# Altium PCB ConnectorsBoard.PcbDoc
Units mil, origin at the board's own origin, x right, y up, seen from the top; angles counter-clockwise.
Board outline 12244.09 x 7755.91 mil, 2 copper layers (Top Layer, Bottom Layer); 25 components, 41 nets, 176 pads, 48 vias.
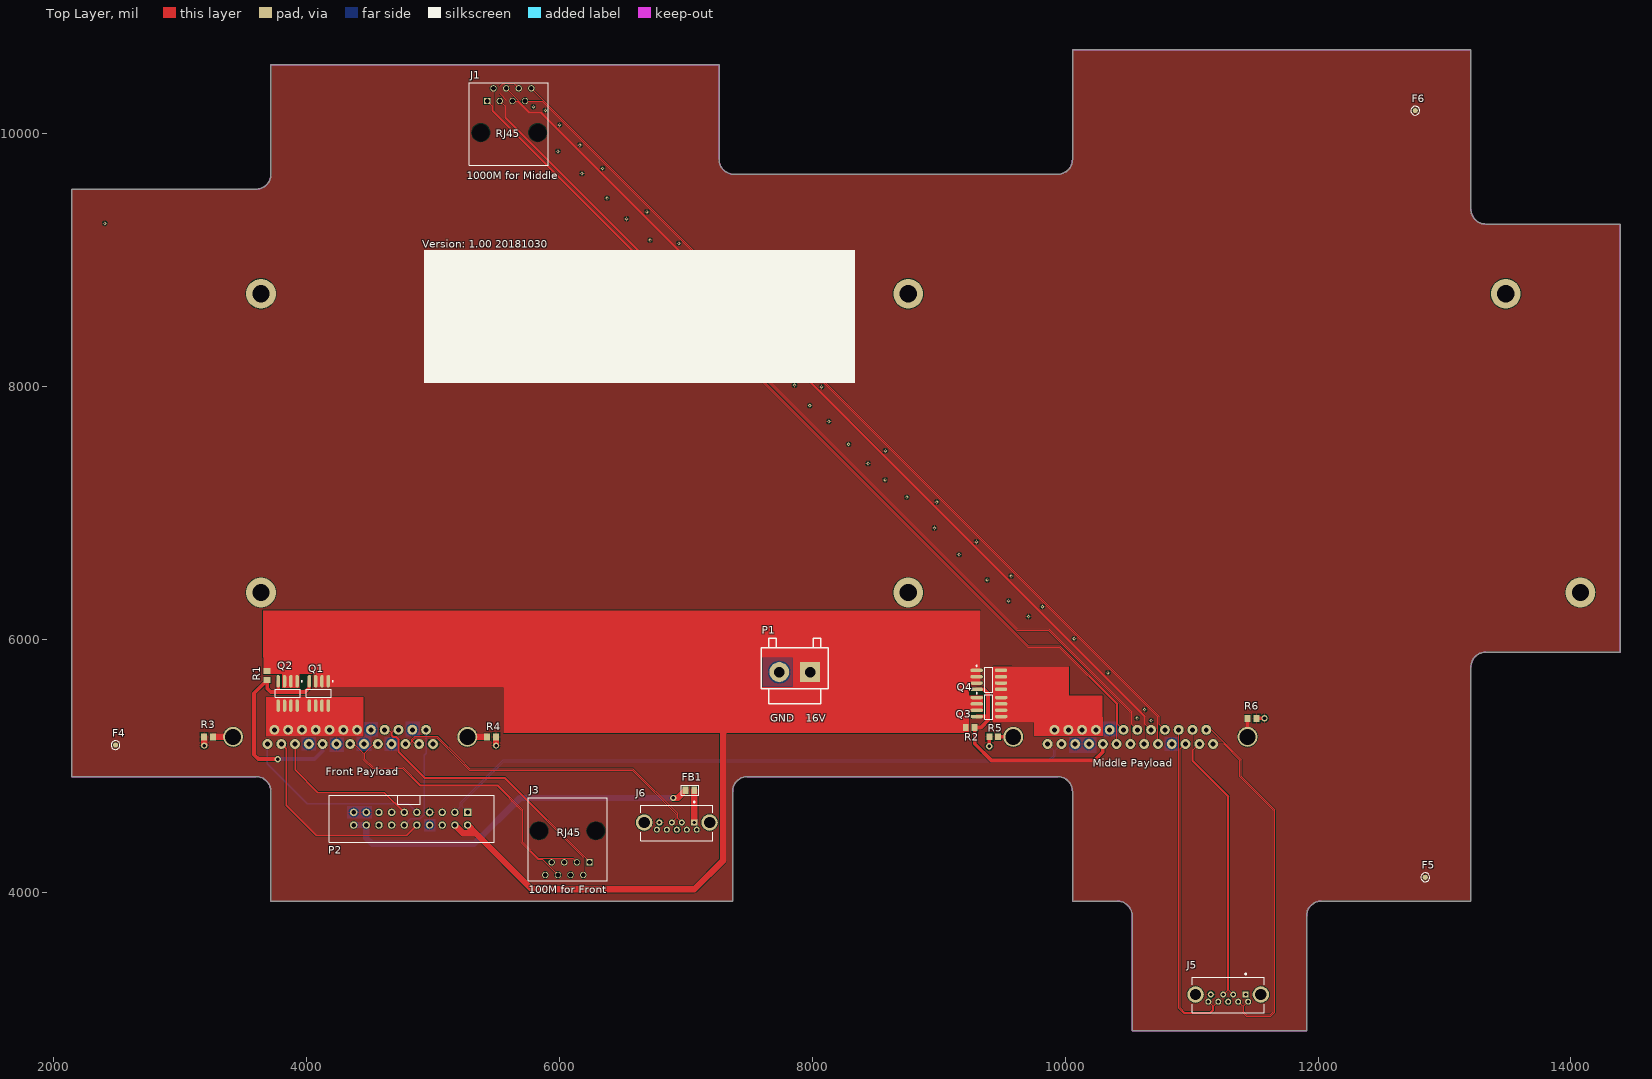
[diagram p0: Top Layer view]
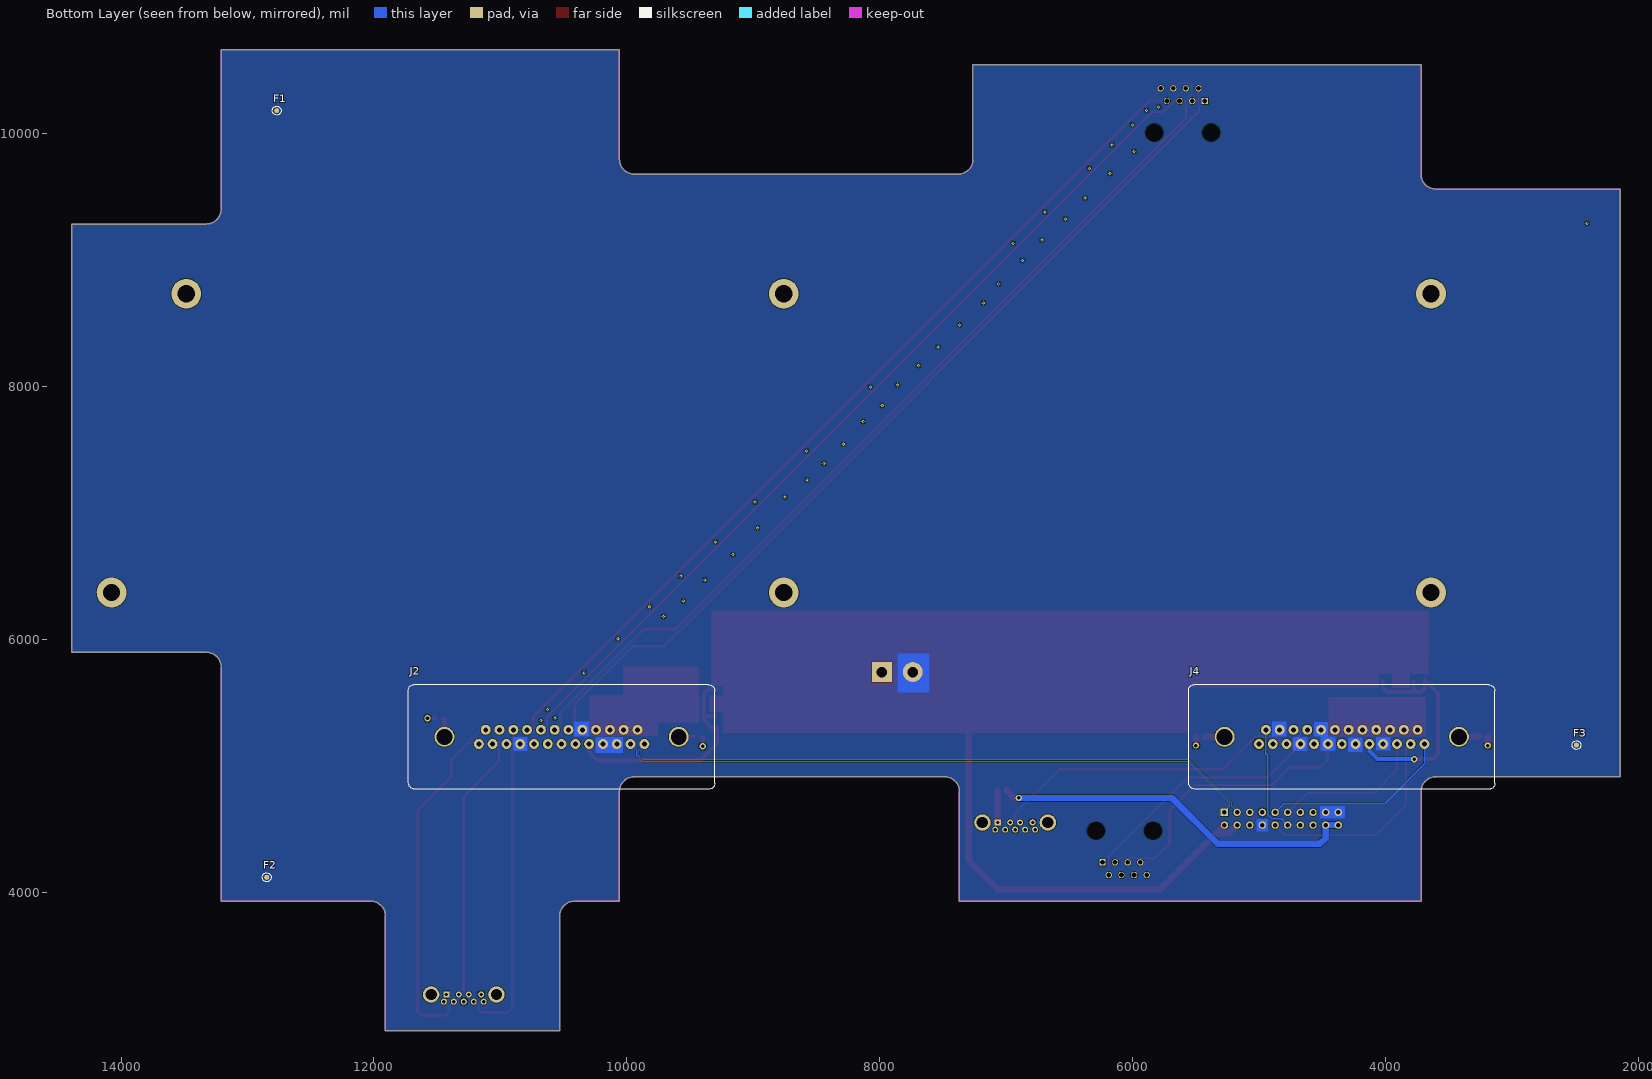
[diagram p1: Bottom Layer view, seen from below]
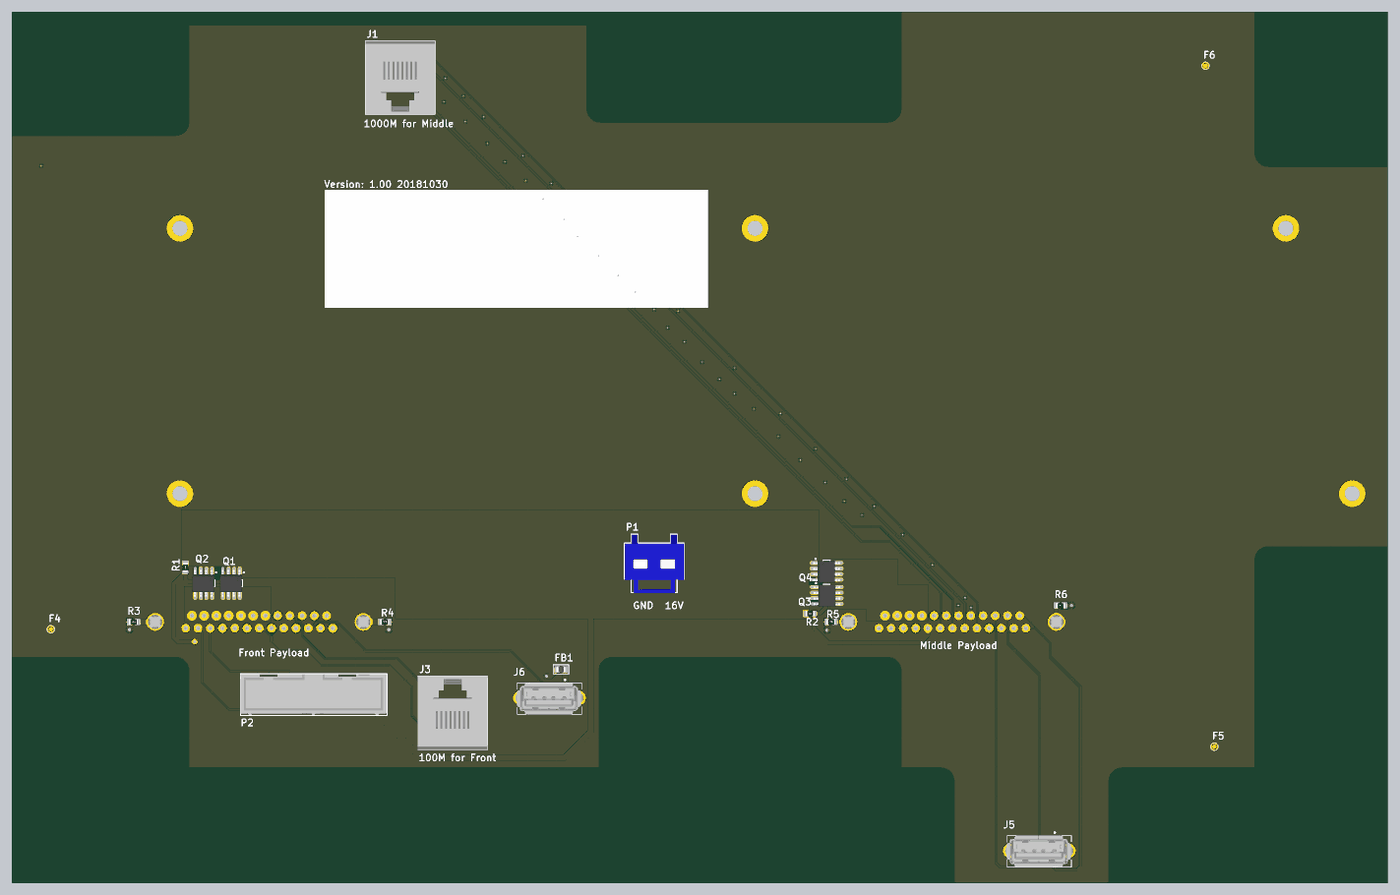
[diagram p2: 3D render of the assembled board from above, using the file's embedded part models]

## Layer stack, top to bottom
Top Solder: solder mask 0.4, Solder Resist, Dk 3.5
Top Layer: signal copper 1.4
Dielectric 1: dielectric 12.6, FR-4, Dk 4.8
Bottom Layer: signal copper 1.4
Bottom Solder: solder mask 0.4, Solder Resist, Dk 3.5

## Board outline
3720.47,3927.96 3720.47,4794.1 ccw(c3602.36,4794.1) 3602.36,4912.21 2145.67,4912.21 2145.67,9557.88 3602.36,9557.88 ccw(c3602.36,9675.99) 3720.47,9675.99 3720.47,10542.13 7263.78,10542.13 7263.78,9794.1 ccw(c7381.89,9794.1) 7381.89,9675.99 9940.94,9675.99 ccw(c9940.94,9794.1) 10059.06,9794.1 10059.06,10660.24 13208.66,10660.24 13208.66,9400.4 ccw(c13326.77,9400.4) 13326.77,9282.29 14389.76,9282.29 14389.76,5896.46 13326.77,5896.46 ccw(c13326.77,5778.35) 13208.66,5778.35 13208.66,3927.96 12027.56,3927.96 ccw(c12027.56,3809.85) 11909.45,3809.85 11909.45,2904.34 10531.5,2904.34 10531.5,3809.85 ccw(c10413.39,3809.85) 10413.39,3927.96 10059.06,3927.96 10059.06,4794.1 ccw(c9940.94,4794.1) 9940.94,4912.21 7488.58,4912.21 ccw(c7488.58,4794.1) 7370.47,4794.1 7370.47,3927.96

## Design rules (kind name [scope] priority, off if disabled: settings)
Clearance Clearance_1 [All] p1: gap=4 ignorepadtopadclearanceinfootprint=FALSE
Clearance [All] p2: gap=4 ignorepadtopadclearanceinfootprint=FALSE
DiffPairsRouting 120 [InDifferentialPair('CAN')] p1: maxlimit=8 minlimit=8 mostfreqgap=8 toplayer_minwidth=5 toplayer_maxwidth=5 toplayer_prefwidth=5 bottomlayer_minwidth=5 bottomlayer_maxwidth=5 bottomlayer_prefwidth=5 maxuncoupledlength=500
DiffPairsRouting 100 [InDifferentialPair('100M_RX')or InDifferentialPair('100M_TX')or InDifferentialPair('A')or InDifferentialPair('B')or InDifferentialPair('C')or InDifferentialPair('D')] p2: maxlimit=4 minlimit=4 mostfreqgap=4 toplayer_minwidth=5.5 toplayer_maxwidth=5.5 toplayer_prefwidth=5.5 bottomlayer_minwidth=5.5 bottomlayer_maxwidth=5.5 bottomlayer_prefwidth=5.5 maxuncoupledlength=500
DiffPairsRouting 90 [InDifferentialPair('USB0')or InDifferentialPair('USB1')or InDifferentialPair('SSRX') or InDifferentialPair('SSTX')] p3: maxlimit=4 minlimit=4 mostfreqgap=4 toplayer_minwidth=7 toplayer_maxwidth=7 toplayer_prefwidth=7 bottomlayer_minwidth=7 bottomlayer_maxwidth=7 bottomlayer_prefwidth=7 maxuncoupledlength=500
HoleSize [All] p1: absolutevalues=TRUE maxlimit=300 minlimit=1 maxpercent=80.000 minpercent=20.000
MinimumSolderMaskSliver [All] p1: minsoldermaskwidth=1
PolygonConnect [All] p1: connectstyle=Relief reliefconductorwidth=10 reliefentries=4 polygonreliefangle="90 Angle" airgapwidth=10
RoutingVias [All] p1: holewidth=28 width=50 viastyle="Through Hole" minholewidth=10 minwidth=10 maxholewidth=200 maxwidth=300
SilkToSolderMaskClearance [IsPad] p1: minsilkscreentomaskgap=5 clearancetoexposedcopper=TRUE
SolderMaskExpansion [All] p1: expansion=4
Width [All] p1: maxlimit=200 minlimit=3 preferedwidth=10
26 further rules are at their usual default settings.

## Classes and differential pairs
differential pair D: +D_P -D_N
differential pair C: +C_P -C_N
differential pair B: +B_P -B_N
differential pair A: +A_P -A_N
differential pair USB1: +USB1_P -USB1_N
differential pair USB0: +USB0_P -USB0_N
differential pair SSTX: +SSTX_P -SSTX_N
differential pair SSRX: +SSRX_P -SSRX_N
differential pair CAN: +CAN_P -CAN_N
differential pair 100M_TX: +100M_TX_P -100M_TX_N
differential pair 100M_RX: +100M_RX_P -100M_RX_N

## Components (designator, comment, footprint, x,y, rotation, side; value= is the part's Value field where it differs from the comment)
F1 "Fiducial, .040\"" "FIDUCIAL, .040\"" 12769,10179 r180 bottom
F2 "Fiducial, .040\"" "FIDUCIAL, .040\"" 12848,4117 r180 bottom
F3 "Fiducial, .040\"" "FIDUCIAL, .040\"" 2492,5162 r180 bottom
F4 "Fiducial, .040\"" "FIDUCIAL, .040\"" 2492,5162 r0 top
F5 "Fiducial, .040\"" "FIDUCIAL, .040\"" 12848,4117 r0 top
F6 "Fiducial, .040\"" "FIDUCIAL, .040\"" 12769,10179 r0 top
FB1 "100Ω ±25% 100MHz" 0805_L 7033,4805 r180 top
J1 "Jack Modular Connector 8p8c (RJ45, Ethernet) Vertical Unshielded Cat3" RJ45-5556416-1 5430,10255 r0 top
J2 "WDB951-PF25GX-XKV1-1_StraightFemale" WDB951-PF25GX-XKV1-1_StraightFemale 10516.5,5227.17 r0 bottom locked
J3 "Jack Modular Connector 8p8c (RJ45, Ethernet) Vertical Unshielded Cat3" RJ45-5556416-1 6240,4235 r180 top
J4 "WDB951-PF25GX-XKV1-1_StraightFemale" WDB951-PF25GX-XKV1-1_StraightFemale 4347.62,5227.17 r0 bottom locked
J5 "10117836-002LF" AMPHENOL_10117836-002LF_10117836-002LF(Primary) 11290,3190 r180 top
J6 "10117836-002LF" AMPHENOL_10117836-002LF_10117836-002LF(Primary) 6930,4550 r180 top
P1 "JST VL 2POS Header" JST-VL-2POS 7984.09,5739.37 r180 top
P2 "Header 10X2H" HDR_2X10 5275,4630 r180 top
Q1 "IRF9310TRPBF" SOIC-SN8_M 4099,5571 r270 top
Q2 "IRF9310TRPBF" SOIC-SN8_M 3853,5571 r270 top
Q3 "IRF9310TRPBF" SOIC-SN8_M 9398,5463 r0 top
Q4 "IRF9310TRPBF" SOIC-SN8_M 9397,5678 r0 top
R1 "Res 0805" RES0805N 3691,5712 r90 top value=10k
R2 "Res 0805" RES0805N 9250,5301 r180 top value=10k
R3 "Res 0805" RES0805N 3228,5227 r180 top value=0
R4 "Res 0805" RES0805N 5465,5227 r0 top value=0
R5 "Res 0805" RES0805N 9436,5228 r180 top value=0
R6 "Res 0805" RES0805N 11478,5374 r0 top value=0

## Footprints (in the part's own frame and the unit in brackets; to place one, negate y for a bottom-side part, rotate by r counter-clockwise, add the part's x,y. Pads: shape width x height; smd on the part's side, far side on the other; paste and mask are expansions set on the pad)
0805_L [mm]
  rect 1.16x1.47 smd: 1(-0.89,0) 2(0.89,0)
  silkscreen extent -1.77,-1.04 1.77,1.03, body extent -1.02,-0.64 1.03,0.64, height 0.6
AMPHENOL_10117836-002LF_10117836-002LF(Primary) [mm]
  rect 1.208x1.208 hole 0.7: 1(-3.5,0)
  round 1.208 hole 0.7: 2(-1,0) 3(1,0) 4(3.5,0) 5(4,1.44) 6(2,1.44) 7(0,1.44) 8(-2,1.44) 9(-4,1.44)
  round 3.316 hole 2.3: S1(-6.57,0) S2(6.57,0)
  silkscreen extent -7.25,-4.24 7.25,3.69, body extent -7.71,-3.42 7.96,3.7, height 14.8
"FIDUCIAL, .040\"" [mil]
  round 40 smd paste-20 mask+15: ""(0,0)
  silkscreen extent -35,-35 35,35
HDR_2X10 [mm] "Connector; Header; 10x2 Position"
  rect 1.5x1.5 hole 0.9: 1(0,0)
  round 1.5 hole 0.9: 2(0,2.54) 3(2.54,0) 4(2.54,2.54) 5(5.08,0) 6(5.08,2.54) 7(7.62,0) 8(7.62,2.54) 9(10.16,0) 10(10.16,2.54) 11(12.7,0) 12(12.7,2.54) 13(15.24,0) 14(15.24,2.54) 15(17.78,0) 16(17.78,2.54) 17(20.32,0) 18(20.32,2.54) 19(22.86,0) 20(22.86,2.54)
  silkscreen extent -5.33,-3.43 27.81,5.97, body extent -5.21,-3.3 27.81,5.92, height 9.22
JST-VL-2POS [mm] "2 PIN JST PH HEADER"
  rect 4x4 hole 2.1: 1(0,0)
  round 4 hole 2.1: 2(6.2,0)
  silkscreen extent -3.6,-6.84 9.8,6.36, body extent -3.6,-6.7 9.8,6.5, height 16.4
RES0805N [mm] "Chip Resistor, Body 2.0x1.3mm, IPC Medium Density"
  rect 1.2x1.4 smd: 1(-0.9,0) 2(0.9,0)
  body extent -1,-0.62 1,0.63, height 0.49
RJ45-5556416-1 [mil]
  rect 50x50 hole 37: 1(0,0)
  round 50 hole 37: 2(50,100) 3(100,0) 4(150,100) 5(200,0) 6(250,100) 7(300,0) 8(350,100)
  round 50 hole 140: MNT(-50,-250) MNT(400,-250)
  silkscreen extent -141,-509 483,145, body extent -139,-507 481,143, height 650
SOIC-SN8_M [mm] "SOIC, 8-Leads, Body 4.9x3.8mm, Pitch 1.27mm, IPC Low Density"
  oval 2.5x0.7 smd: 1(-2.45,1.905) 2(-2.45,0.635) 3(-2.45,-0.635) 4(-2.45,-1.905) 5(2.45,-1.905) 6(2.45,-0.635) 7(2.45,0.635) 8(2.45,1.905)
  silkscreen extent -2.57,-2.5 0.8,2.93, body extent -3.01,-2.59 3.01,2.41, height 1.75
WDB951-PF25GX-XKV1-1_StraightFemale [mm]
  round 2 hole 1: 1(16.62,1.42) 2(13.85,1.42) 3(11.08,1.42) 4(8.31,1.42) 5(5.54,1.42) 6(2.77,1.42) 7(0,1.42) 8(-2.77,1.42) 9(-5.54,1.42) 10(-8.31,1.42) 11(-11.08,1.42) 12(-13.85,1.42) 13(-16.62,1.42) 14(15.235,-1.42) 15(12.465,-1.42) 16(9.695,-1.42) 17(6.925,-1.42) 18(4.155,-1.42) 19(1.385,-1.42) 20(-1.385,-1.42) 21(-4.155,-1.42) 22(-6.925,-1.42) 23(-9.695,-1.42) 24(-12.465,-1.42) 25(-15.235,-1.42)
  round 4 hole 3.2: 26(-23.525,0) 27(23.525,0)
  silkscreen extent -30.75,-10.5 30.75,10.5, body extent -30.75,-11.74 30.75,11.92, height 15.65

## Part data
FB1: library part "0805 100Ω 25% 100MHz", "贴片磁珠", Package=0805, SuppliersPartNumber=C1015, ComponentLink1Description=供应商链接, ComponentLink1URL=http://www.szlcsc.com/product/details_1367.html, Supplier=LC
J1 J3: library part 5556416-1, "RJ45 connector 180 degrees", Manufacturer=TE, Package=Header, Supplier 1 Part Number=A31428-ND, Component Type=Standard, Manufacturer Part Number=5556416-1, Mounting Type=thru-hole, Part Number=5556416-1, Pin Count=8, Price Break=1000, Supplier 1=Digikey, Unit Price-Supplier 1=1.04, Unit Price in Quantity=.5722, Vendor/Distributor=Digikey
J2 J4: Package=header, Component Type=Standard, Mounting Type=thru-hole, Part Number=WDB951-PF25GX-XKV1-1_StraightFemale, Pin Count=25
J5 J6: "Usb, 3.0 Type A, Receptacle, SMT", Manufacturer="Amphenol FCI", Package=None, Digi-Key_Part_Number=609-4660-ND, Digi-Key_Purchase_URL=https://www.digikey.com/product-detail/en/amphenol-fci/10117836-002LF/609-4660-ND/3641378?utm_source=snapeda&utm_medium=aggregator&utm_campaign=symbol, Manufacturer Part Number=10117836-002LF, SnapEDA_Link=https://www.snapeda.com/parts/10117836-002LF/Amphenol%20FCI/view-part/?ref=snap
P1: library part "CONN HEADER 2POS VL SERIES TIN", "CONN HEADER 2POS VL SERIES TIN", Manufacturer="JST Sales America Inc", Manufacturer Part Number=B02P-VL, Package=header, Supplier 1 Part Number=455-2361-ND, Component Type=Standard, Mounting Type=thru-hole, Part Number="CONN HEADER 2POS VL SERIES TIN", Pin Count=2, Price Break=1000, Supplier 1=Digikey, Unit Price in Quantity=0.3104, Vendor/Distributor=Digikey
P2: "Header, 10-Pin, Dual row, Right Angle", Manufacturer="Assmann WSW Components", Manufacturer Part Number="AWHW 10G-0202-T", LatestRevisionDate=17-Jul-2002, LatestRevisionNote="Re-released for DXP Platform.", Publisher="Altium Limited"
Q1 Q2 Q3 Q4: "MOSFET P-CH 30V 20A 8-SOIC", Manufacturer="International Rectifier", Package=SOIC-8, Supplier 1 Part Number=IRF9310TRPBFCT-ND, Component Type=Standard, Manufacturer Part Number=IRF9310TRPBF, Mounting Type=smt, PackageDescription=SOIC-SN8_M, Part Number=IRF9310TRPBF, Price Break=1000, Supplier 1=Digikey, Unit Price-Supplier 1=1.94, Unit Price in Quantity=0.7271, Vendor/Distributor=Digikey
R1 R2: library part "RES 10.0K OHM 1/8W 1% 0805 SMD", "RES 10.0K OHM 1/8W 1% 0805 SMD", Manufacturer="Panasonic - ECG", Manufacturer Part Number=ERJ-6ENF1002V, Package=0805, Supplier 1 Part Number=P10.0KCCT-ND, Component Type=Standard, Mounting Type=smt, Part Number="RES 10.0K OHM 1/8W 1% 0805 SMD", Price Break=5000, Supplier 1=Digikey, Unit Price-Supplier 1=.07, Unit Price in Quantity=.005, Vendor/Distributor=Digikey
R3 R4 R5 R6: library part "RES 0.0 OHM 1/8W 0805 SMD", "RES 0.0 OHM 1/8W 0805 SMD", Manufacturer="Stackpole Electronics Inc", Manufacturer Part Number=RMCF0805ZT0R00, Package=0805, Supplier 1 Part Number=RMCF0805ZT0R00CT-ND, Component Type=Standard, Mounting Type=smt, Part Number="RES 0.0 OHM 1/8W 0805 SMD", Price Break=5000, Supplier 1=Digikey, Unit Price-Supplier 1=.03, Unit Price in Quantity=.0019, Vendor/Distributor=Digikey
F1 F2 F3 F4 F5 F6: Component Type="Standard (No BOM)", Part Number="Fiducial, .040\""

## Free pads (board coordinates)
  round 236.22 hole 135: 1(3641.73,6368.91) 1(3641.73,8731.11) 1(8759.84,6368.91) 1(8759.84,8731.11) 1(13484.25,8731.11) 1(14074.8,6368.91)

## Via types
v1: diameter 24, hole 12, Top Layer to Bottom Layer, tented both sides, 42 vias
v2: diameter 50, hole 28, Top Layer to Bottom Layer, tented both sides, 5 vias
v3: diameter 50, hole 28, Top Layer to Bottom Layer, 1 vias

## Nets (pads, with @x,y where several pads share a name; then routed paths per layer and width w, separated by ;. In a path a pad name is that pad's centre, name@x,y a point inside that pad or via, vN(x,y) a via of type N, cw(c..) or ccw(c..) an arc to the next point about the centre after c; other vN are vias at no path point)
5V: FB1.2 P2.18 P2.20 | length 2920.6
  Top Layer w50: v2(6903,4744) 6936.96,4744 FB1.2
  Bottom Layer w50: P2.20 P2.18 4475,4427 4521,4381 5327,4381 5690,4744 v2(6903,4744)
16V: P1.1 P2.2 P2.4 Q1.1 Q1.2 Q1.3 Q2.1 Q2.2 Q2.3 Q3.1 Q3.2 Q3.3 Q4.1 Q4.2 Q4.3 R1.2 R2.2 | length 3621.2
  Top Layer w50: P2.4 5239,4466 5339,4466 ; P2.2 5339,4466 ; 7296,5354 7296,4250 7067,4021 5784,4021 5339,4466
100M_RX_N: J3.6 J4.7 | length 2251.4
  Top Layer w5.5: J4.7 4376.65,5171.27 4451.92,5096 4451.92,5048.06 4520.49,4979.5 4758,4979.5 4898.5,4839 5510,4839 5701,4648 5701,4389.06 5830.56,4259.5 5865.5,4259.5 J3.6
100M_RX_P: J3.3 J4.5 | length 2348.2
  Top Layer w5.5: J4.5 4536.69,5171.27 4461.42,5096 4461.42,5052 4524.42,4989 4761.94,4989 4902.44,4848.5 5513.94,4848.5 5710.5,4651.94 5710.5,4393 5834.5,4269 6106,4269 J3.3
100M_TX_N: J3.2 J4.17 | length 2201.4
  Top Layer w5.5: J4.17 4649.95,5283.08 4670.03,5263 4670.03,5259.06 4670.5,5258.6 4670.5,5235.06 4682.06,5223.5 4706.5,5223.5 4726,5204 4726,5105.56 4932.56,4899 5566.56,4899 6190,4275.56 J3.2
100M_TX_P: J3.1 J4.16 | length 2118.2
  Top Layer w5.5: J4.16 4699.61,5283.08 4679.53,5263 4680,5262.53 4680,5239 4686,5233 4710.44,5233 4735.5,5207.94 4735.5,5109.5 4936.5,4908.5 5570.5,4908.5 6240,4239 J3.1
+16V_FPL: J4.19 J4.20 J4.21 J4.22 J4.23 J4.24 J4.25 Q1.5 Q1.6 Q1.7 Q1.8 Q2.5 Q2.6 Q2.7 Q2.8
+16V_MPL: J2.22 J2.23 J2.24 J2.25 Q3.5 Q3.6 Q3.7 Q3.8 Q4.5 Q4.6 Q4.7 Q4.8
A_N: J1.2 J2.20 | length 7281.4
  Top Layer w5.5: J1.2 5480,10177 9710,5947 9959,5947 10416.94,5489.06 10416.94,5328.11 J2.20
A_P: J1.1 J2.8 | length 7291.3
  Top Layer w5.5: J1.1 5470.5,10214.5 5470.5,10173.07 9706.07,5937.5 9955.07,5937.5 10407.44,5485.12 J2.8
B_N: J1.6 J2.19 | length 7493.5
  Top Layer w5.5: J1.6 5641,10394 5556,10394 5532,10370 5532,10312 5582,10262 5582,10122 9623.5,6080.5 9871.5,6080.5 10526,5426 10526,5328.11 J2.19
B_P: J1.3 J2.7 | length 7294.5
  Top Layer w5.5: J1.3 5572.5,10212.5 5572.5,10118.07 9619.57,6071 9867.57,6071 10516.5,5422.07 J2.7
C_N: J1.5 J2.6 | length 7226.2
  Top Layer w5.5: J1.5 5666.56,10255 5760.06,10161.5 5848.5,10161.5 10625.55,5384.45 J2.6
C_P: J1.4 J2.18 | length 7236.2
  Top Layer w5.5: J1.4 5764,10171 5852.44,10171 10635.05,5388.38 10635.05,5328.11 J2.18
CAN_N: J2.13 P2.3 | length 5050.5
  Bottom Layer w5: P2.3 5218.5,4673.5 5218.5,4707.38 5556.12,5045 9871.62,5045 9910.19,5083.58 9910.19,5123.24 J2.13
CAN_P: J2.12 P2.1 | length 5050.5
  Bottom Layer w5: P2.1 5231.5,4673.5 5231.5,4702 5561.5,5032 9877,5032 9923.19,5078.19 9923.19,5123.24 J2.12
D_N: J1.8 J2.17 | length 7146.8
  Top Layer w5.5: J1.8 10744.11,5390.89 10744.11,5328.11 J2.17
D_P: J1.7 J2.5 | length 7236.7
  Top Layer w5.5: J1.7 5866.56,10255 10734.61,5386.96 J2.5
GND: J2.4 J2.10 J2.11 J2.21 J4.1 J4.4 J4.6 J4.8 J4.10 J4.15 J4.18 J5.4 J5.7 J6.4 J6.7 P1.2 P2.7 P2.8 P2.17 P2.19 R3.2 R4.2 R5.2 R6.2 | length 275.1
  Top Layer w30: v2(9400.57,5153.43) R5.2 ; R6.2 v2(11577,5374)
  Top Layer w50: v2(3192.57,5158.57) R3.2 ; v2(5500.43,5158.43) R4.2
  other v1: 10681,5355 10569,5375 10629,5442 10339,5734 10072,6003 9711,6178 9820,6256 9554,6302 9384,6468 9573,6499 9162,6668 9299,6769 8967,6878 8986,7084 8749,7122 8577,7259 8442,7388 8579,7489 8289,7541 8132,7720 7981,7846 8075,7995 7861,8008 7694,8163 7541,8311 7369,8485 7181,8658 7061,8808 6873,8994 6946,9130 6718,9155 2407,9288 6533,9323 6694,9378 6378,9487 6180,9681 6344,9723 5990,9857 6164,9907 6004,10067 5891,10181 5795,10209
I2C_SCL: P2.5
I2C_SDA: P2.6
ICSP_3.3V: J4.13 P2.9 | length 1497.6
  Bottom Layer w10: J4.13 3693.29,5014.71 4009,4699 4806,4699 P2.9
MCLR: J4.14 P2.12 | length 868.4
  Bottom Layer w10: P2.12 4778,4530 4827,4579 4899,4579 4932,4612 4932,5083 4947.42,5098.42 J4.14
NetFB1_1: FB1.1 J6.1 | length 255.9
  Top Layer w50: J6.1 7069.04,4551.24 7069.04,4804 FB1.1
NetJ2_26: J2.26 R5.1 | length 119.2
  Top Layer w30: R5.1 9589.49,5228 J2.26
NetJ2_27: J2.27 R6.1 | length 146.9
  Top Layer w30: R6.1 11442.57,5227.28 J2.27
NetJ4_26: J4.26 R3.1 | length 157.8
  Top Layer w50: R3.1 J4.26@3421.26,5227
NetJ4_27: J4.27 R4.1 | length 155.8
  Top Layer w50: J4.27 5429.39,5227.17 R4.1
PGEC: J4.12 P2.10 | length 1667.6
  Top Layer w10: J4.12 3840,5133.61 3840,4686 4077,4449 4794,4449 P2.10
PGED: J4.11 P2.11 | length 1208.3
  Top Layer w10: J4.11 3911.4,4965.6 4090,4787 4618,4787 P2.11
PWR_Present_FrontPL: J4.9 Q1.4 Q2.4 R1.1 | length 1839.5
  Top Layer w30: v3(3774,5051) 3622,5051 3587,5086 3587,5572.57 R1.1 3691,5609 3719,5581 3781,5581 ; Q2.4 3778,5584 3781,5581 ; Q1.4 4024,5616 3989,5581 3781,5581
  Bottom Layer w30: v3(3774,5051) 4066,5051 4129.51,5114.51 J4.9
PWR_Present_MidPL: J2.9 Q3.4 Q4.4 R2.1 | length 1823
  Top Layer w30: Q4.4 9359,5603 9391,5571 9391,5389 ; Q3.4 9390,5388 9391,5389 ; J2.9 10298.39,5107.39 10232,5041 9417,5041 9285.43,5172.57 R2.1 9334,5301 9391,5358 9391,5389
SSRX_N: J2.3 J5.5 | length 2464.1
  Top Layer w7: J2.3 10946.27,5171.27 10909.19,5134.19 10909.19,3084.81 10943,3051 11146.39,3051 11166.39,3071 11166.39,3099.44 J5.5
SSRX_P: J2.16 J5.6 | length 2590.5
  Top Layer w7: J2.16 10898.19,3080.25 10938.44,3040 11150.95,3040 11177.39,3066.44 11177.39,3099.44 J5.6
SSTX_N: J2.14 J5.8 | length 2860.9
  Top Layer w7: J2.14 11156.48,5283.08 11393,5046.56 11393,4916.56 11655.78,4653.78 11659,4650.56 11659,3050.44 11655.78,3047.22 11627.56,3019 11433.05,3019 11402.61,3049.44 11402.61,3099.44 J5.8
SSTX_P: J2.1 J5.9 | length 2709.9
  Top Layer w7: J2.1 11252.73,5171.27 11382,5042 11382,4912 11648,4646 11648,3055 11623,3030 11437.61,3030 11413.61,3054 11413.61,3099.44 J5.9
USB0_N: J4.3 J6.2 | length 2525.7
  Top Layer w7: J4.3 4814.13,5171.27 4832.86,5190 4832.86,5206.42 4856.22,5229.78 4859.44,5233 5036.56,5233 5207.78,5061.78 5294.56,4975 6582.06,4975 6935.5,4621.56 6935.5,4583.87 J6.2
USB0_P: J4.2 J6.3 | length 2489.3
  Top Layer w7: J4.2 4862.6,5171.27 4843.86,5190 4843.86,5201.86 4864,5222 5032,5222 5290,4964 6577.5,4964 6924.5,4617 6924.5,4583.87 J6.3
USB1_N: J2.2 J5.2 | length 2130.9
  Top Layer w7: J2.2 11015,5124.5 11015,5040 11295.5,4759.5 11295.5,3223.87 J5.2
USB1_P: J2.15 J5.3 | length 2224.6
  Top Layer w7: J2.15 11004,5279.83 11004,5035.44 11284.5,4754.94 11284.5,3223.87 J5.3
VBUS: J5.1
pads on no net: F1. F2. F3. F4. F5. F6. J1.MNT J3.4 J3.5 J3.7 J3.8 J3.MNT J5.S1 J5.S2 J6.5 J6.6 J6.8 J6.9 J6.S1 J6.S2 P2.13 P2.14 P2.15 P2.16

## Polygon pours and split planes (outlines as drawn)
GND on Bottom Layer "GND_L02_P000" (solid, remove dead copper, pour order 0): 3720.47,3927.96 3720.47,4794.1 ccw(c3602.36,4794.1) 3602.36,4912.21 2145.67,4912.21 2145.67,9557.88 3602.36,9557.88 ccw(c3602.36,9675.99) 3720.47,9675.99 3720.47,10542.13 7263.78,10542.13 7263.78,9794.1 ccw(c7381.89,9794.1) 7381.89,9675.99 9940.94,9675.99 ccw(c9940.94,9794.1) 10059.06,9794.1 10059.06,10660.24 13208.66,10660.24 13208.66,9400.4 ccw(c13326.77,9400.4) 13326.77,9282.29 14389.76,9282.29 14389.76,5896.46 13326.77,5896.46 ccw(c13326.77,5778.35) 13208.66,5778.35 13208.66,3927.96 12027.56,3927.96 ccw(c12027.56,3809.85) 11909.45,3809.85 11909.45,2904.34 10531.5,2904.34 10531.5,3809.85 ccw(c10413.39,3809.85) 10413.39,3927.96 10059.06,3927.96 10059.06,4794.1 ccw(c9940.94,4794.1) 9940.94,4912.21 7488.58,4912.21 ccw(c7488.58,4794.1) 7370.47,4794.1 7370.47,3927.96
GND on Top Layer "GND_L01_P001" (solid, remove dead copper, pour order 1): 3720.47,3927.96 3720.47,4794.1 ccw(c3602.36,4794.1) 3602.36,4912.21 2145.67,4912.21 2145.67,9557.88 3602.36,9557.88 ccw(c3602.36,9675.99) 3720.47,9675.99 3720.47,10542.13 7263.78,10542.13 7263.78,9794.1 ccw(c7381.89,9794.1) 7381.89,9675.99 9940.94,9675.99 ccw(c9940.94,9794.1) 10059.06,9794.1 10059.06,10660.24 13208.66,10660.24 13208.66,9400.4 ccw(c13326.77,9400.4) 13326.77,9282.29 14389.76,9282.29 14389.76,5896.46 13326.77,5896.46 ccw(c13326.77,5778.35) 13208.66,5778.35 13208.66,3927.96 12027.56,3927.96 ccw(c12027.56,3809.85) 11909.45,3809.85 11909.45,2904.34 10531.5,2904.34 10531.5,3809.85 ccw(c10413.39,3809.85) 10413.39,3927.96 10059.06,3927.96 10059.06,4794.1 ccw(c9940.94,4794.1) 9940.94,4912.21 7488.58,4912.21 ccw(c7488.58,4794.1) 7370.47,4794.1 7370.47,3927.96

## Keep-outs
Keep-Out Layer:
  the board outline again, w0.5

## Other copper
Top Layer:
  rectangle net 16V: 5561,5257 7845,5623
  rectangle net 16V: 4197,5618 7604,5857
  rectangle net 16V: 3656,5856 9330,6226
  rectangle net 16V: 9231,5423 9352,5554
  rectangle net 16V: 9208,5634 9330,6226
  rectangle net 16V: 7845,5257 9239,5887
  rectangle net +16V_MPL: 9531,5500 10031,5783
  rectangle net +16V_MPL: 9425,5342 10297,5554
  rectangle net +16V_MPL: 9432,5358 9580,5784
  rectangle net +16V_MPL: 9756,5236 10298,5385
  rectangle net 16V: 4057,5618 4197,5765
  rectangle net 16V: 3807,5615 3947,5766
  rectangle net 16V: 3661,5723 4197,5915
  rectangle net +16V_FPL: 3682,5232 4453,5542
Bottom Layer:
  rectangle net GND: 10785,5114 10901,5227
  rectangle net GND: 10300,5229 10417,5347
  rectangle net GND: 10030,5101 10250,5225
  rectangle net GND: 4783,5231 4900,5348
  rectangle net GND: 4618,5116 4735,5225
  rectangle net GND: 4456,5229 4569,5346
  rectangle net GND: 4397,5114 4515,5229
  rectangle net GND: 4185,5108 4299,5223
  rectangle net GND: 3963,5120 4078,5225
  rectangle net GND: 4932,4479 5020,4576
  rectangle net GND: 4322,4583 4521,4679
  rectangle net GND: 7609,5579 7861,5887

## Silkscreen, mask and mechanical layers (free items; w line width, h text height)
Top Overlay:
  rectangle: 4930,8025 8340,9075
  text "1000M for Middle" at 5270,9635 h60
  text "Version: 1.00 20181030" at 4919,9095 h60
  text "GND" at 7667,5345 h60
  text "16V" at 7951,5345 h60
  text "Middle Payload" at 10220,4990 h60
  text "Front Payload" at 4155,4925 h60
  text "100M for Front" at 5760,3990 h60
Mechanical 2:
  drawing of 163 lines, arcs and shapes, not listed
  text "1" at 1361.55,11443.62 h72.92
  text "2" at 3313.65,11443.62 h72.92
  text "3" at 5282.15,11443.62 h72.92
  text "4" at 7250.66,11443.62 h72.92
  text "5" at 9219.16,11443.62 h72.92
  text "6" at 11187.66,11443.62 h72.92
  text "7" at 13156.17,11443.62 h72.92
  text "8" at 15124.67,11443.62 h72.92
  text "A" at 262.47,10813.7 h72.92
  text "A" at 16207.35,10813.7 h72.92
  text "B" at 262.47,8845.2 h72.92
  text "B" at 16207.35,8845.2 h72.92
  text "C" at 262.47,6876.69 h72.92
  text "C" at 16207.35,6876.69 h72.92
  text "D" at 262.47,4908.19 h72.92
  text "D" at 16207.35,4908.19 h72.92
  text "E" at 262.47,2939.69 h72.92
  text "DEBUR AND" at 12169.65,2322.96 h59.06
  text "UNLESS OTHERWISE SPECIFIED:" at 8991.88,2319.72 h59.06
  text "FINISH:" at 10321.7,2319.66 h59.06
  text "DO NOT SCALE DRAWING" at 13402.15,2265.08 h59.06
  text "REVISION" at 15005.02,2257.28 h59.06
  text "BREAK SHARP" at 12169.65,2224.53 h59.06
  text "DIMENSIONS ARE IN MILLIMETERS" at 8991.88,2221.3 h59.06
  text "EDGES" at 12169.65,2126.11 h59.06
  text "SURFACE FINISH:" at 8991.88,2122.87 h59.06
  text "TOLERANCES:" at 8991.88,2024.45 h59.06
  text "LINEAR:" at 9058.31,1926.02 h59.06
  text "ANGULAR:" at 9058.31,1827.6 h59.06
  text "DATE" at 10827.35,1636.86 h59.06
  text "SIGNATURE" at 10150.93,1636.29 h59.06
  text "NAME" at 9532.37,1633.92 h59.06
  text "TITLE:" at 12903.79,1625.13 h59.06
  text "DRAWN" at 8976.86,1473.61 h59.06
  text "CHK'D" at 8984.66,1305.29 h59.06
  text "APPV'D" at 8984.32,1144.26 h59.06
  text "MFG" at 8986.42,973.77 h59.06
  text "F" at 262.47,971.18 h72.92
  text "MATERIAL:" at 11159.29,826.22 h59.06
  text "Q.A" at 8994.84,801.17 h59.06
  text "DWG NO." at 12908.42,782.23 h59.06
  text "payload2_pcb_asm" at 14492.71,772.9 h250
  text "A3" at 15981.14,759.86 h114.58
  text "1" at 1361.55,341.26 h72.92
  text "2" at 3313.65,341.26 h72.92
  text "3" at 5282.15,341.26 h72.92
  text "4" at 7250.66,341.26 h72.92
  text "WEIGHT:" at 11158.18,312.96 h59
  text "SCALE:1:1" at 12908.42,311.03 h59.06
  text "SHEET 1 OF 1" at 14656.63,311.03 h59.06

## Text inside footprints (layer, text, board x,y; h text height)
J1: Top Overlay "RJ45" at 5500,9968 h60
J3: Top Overlay "RJ45" at 5980,4440 h60